# Allegro board PCB EDITOR TUTORIAL.brd

Outline 100 x 50 mm; copper layers: TOP, POWER PLANE, BOTTOM. Coordinates in mm from the lower left corner of the outline.
Outline path: rectangle 0,0 100,50

## Design rules (mm)
constraint set DEFAULT: min track width 0.127
net group DPD: nets D+ D-

## Placement (name value [footprint] x y rotation side)
C1  10uF  [0402-CAP]  4.65 24 180 top
C2  100uF  [1210]  4 13.35 90 top
C3  10uF  [0402-CAP]  10 31.25 270 top
C4  0.1uF  [0402-CAP]  3.35 21 0 top
C5  0.1uF  [0402-CAP]  3.35 18 0 top
C6  0.1uF  [0402-CAP]  2 36 90 top
C7  0.1uF  [0402-CAP]  28 21 270 top
C8  0.1uF  [0402-CAP]  4.65 36 90 top
C9  10uF  [0402-CAP]  28.65 24 180 top
IC1  PIC32MX440F512H  [SQFP-S-10X10-64]  18.29 25 90 top
JP2  PIC 32 PROG  [1X06_LOCK]  13 12 0 top
JP9  -  [XTEND-DIGI-MODEM]  64 25 0 top
MAIN_PWR  RED  [LED_LNJ]  18.29 5 90 top
NOREF  -  [unnamed]  96 4 0 top
NOREF#2  -  [unnamed]  4 4 0 top
NOREF#3  -  [unnamed]  4 46 0 top
NOREF#4  -  [unnamed]  96 46 0 top
R1  150  [0402-RES]  15.54 5 90 top
R2  56k  [0402-RES]  28.65 17 0 top
U1  LT1965  [MSOP-8_MS]  4.21 29 0 top
X1  USB-B  [USB-MICROB]  19.34 45 180 top
Y1  8MHz  [CRYSTAL-SMD-5X3]  12 35.5 270 top

## Library data of the parts
C1-C9 = CAP
IC1 = PIC32MX440F512H
JP2 = M06_LOCK
JP9 = XTEND-DIGI-MODEM
MAIN_PWR = LED: Tolerance: TOL
R1 R2 = RESISTOR
U1 = LT1965: Tolerance: TOL
X1 = USB-MicroB
Y1 = CRYSTAL

## Footprints (pads in the part's own frame, mm; a bottom-side part is the same pattern mirrored in y, then rotated)
1X06_LOCK
  round 1.88 hole 1.016: 1(0,0) 2(2.54,-0.254) 3(5.08,0) 4(7.62,-0.254) 5(10.16,0) 6(12.7,-0.254)
0402-CAP
  rect 0.7x0.9 smd: 1(-0.65,0) 2(0.65,0)
0402-RES
  rect 0.7x0.9 smd: 1(-0.65,0) 2(0.65,0)
1210
  rect 1.2x2 smd: 1(-1.6,0) 2(1.6,0)
CRYSTAL-SMD-5X3
  rect 1.1x1.9 smd: 1(-1.15,1.85) 2(-1.15,-1.85) 3(1.15,-1.85) 4(1.15,1.85)
LED_LNJ
  rect 0.445x0.95 smd: 1(-0.652,0) 2(0.652,0)
MSOP-8_MS
  rect 1.397x0.432 smd: 1(-2.21,0.975) 2(-2.21,0.325) 3(-2.21,-0.325) 4(-2.21,-0.975) 5(2.21,-0.975) 6(2.21,-0.325) 7(2.21,0.325) 8(2.21,0.975)
SQFP-S-10X10-64
  rect 1.6x0.295 smd: 1(-5.6,3.75) 2(-5.6,3.25) 3(-5.6,2.75) 4(-5.6,2.25) 5(-5.6,1.75) 6(-5.6,1.25) 7(-5.6,0.75) 8(-5.6,0.25) 9(-5.6,-0.25) 10(-5.6,-0.75) 11(-5.6,-1.25) 12(-5.6,-1.75) 13(-5.6,-2.25) 14(-5.6,-2.75) 15(-5.6,-3.25) 16(-5.6,-3.75) 33(5.6,-3.75) 34(5.6,-3.25) 35(5.6,-2.75) 36(5.6,-2.25) 37(5.6,-1.75) 38(5.6,-1.25) 39(5.6,-0.75) 40(5.6,-0.25) 41(5.6,0.25) 42(5.6,0.75) 43(5.6,1.25) 44(5.6,1.75) 45(5.6,2.25) 46(5.6,2.75) 47(5.6,3.25) 48(5.6,3.75)
  rect 0.295x1.6 smd: 17(-3.75,-5.6) 18(-3.25,-5.6) 19(-2.75,-5.6) 20(-2.25,-5.6) 21(-1.75,-5.6) 22(-1.25,-5.6) 23(-0.75,-5.6) 24(-0.25,-5.6) 25(0.25,-5.6) 26(0.75,-5.6) 27(1.25,-5.6) 28(1.75,-5.6) 29(2.25,-5.6) 30(2.75,-5.6) 31(3.25,-5.6) 32(3.75,-5.6) 49(3.75,5.6) 50(3.25,5.6) 51(2.75,5.6) 52(2.25,5.6) 53(1.75,5.6) 54(1.25,5.6) 55(0.75,5.6) 56(0.25,5.6) 57(-0.25,5.6) 58(-0.75,5.6) 59(-1.25,5.6) 60(-1.75,5.6) 61(-2.25,5.6) 62(-2.75,5.6) 63(-3.25,5.6) 64(-3.75,5.6)
unnamed
  round 4.064 hole 3.81: (0,0)
USB-MICROB
  rect 0.35x1.4 smd: D+(0,2.65) D-(-0.65,2.65) GND(1.3,2.65) ID(0.65,2.65) VBUS(-1.3,2.65)
  rect 1.8x1.9 smd: MT1(-3.8,0) MT2(3.8,0)
  rect 2.1x1.6 smd: MT3(-3.1,2.55) MT4(3.1,2.55)
  rect 1.9x1.9 smd: P_1(-1.2,0) P_2(1.2,0)
XTEND-DIGI-MODEM
  round 0 hole 3.3 unplated: (-26.5,14.5) (-26.5,-14.5) (26.5,14.5) (26.5,-14.5)
  round 1.422 hole 0.7: 1(-27.5,9) 2(-25.5,9) 3(-27.5,7) 4(-25.5,7) 5(-27.5,5) 6(-25.5,5) 7(-27.5,3) 8(-25.5,3) 9(-27.5,1) 10(-25.5,1) 11(-27.5,-1) 12(-25.5,-1) 13(-27.5,-3) 14(-25.5,-3) 15(-27.5,-5) 16(-25.5,-5) 17(-27.5,-7) 18(-25.5,-7) 19(-27.5,-9) 20(-25.5,-9)

## Nets
3.3V: C2.1 C4.1 C5.1 C6.1 C7.1 C8.1 IC1.10 IC1.19 IC1.26 IC1.35 IC1.38 JP2.2 R1.1 R2.1 U1.1 U1.2(OUT_1) U1.3
GND: C1.2 C2.2 C3.2 C4.2 C5.2 C6.2 C7.2 C8.2 C9.2 IC1.9 IC1.20 IC1.25 IC1.41 JP2.3 JP9.1 MAIN_PWR.1(CATHODE) U1.4 U1.5 X1.GND Y1.2 Y1.4(GND_4)
VBUS: C1.1 IC1.34 JP9.2(VCC) U1.6 U1.7 U1.8 X1.VBUS
CTS: IC1.21 JP9.9
D+: IC1.37 X1.D+
D-: IC1.36 X1.D-
PROG0: IC1.17 JP2.5
PROG1: IC1.18 JP2.4
RESET: IC1.7(_MCLR) JP2.1
RTS: IC1.29 JP9.10
SHDN: IC1.59 JP9.7
URX: IC1.31 JP9.6
UTX: IC1.32 JP9.5
N01360: MAIN_PWR.2 R1.2
N01559: C3.1 JP9.11 R2.2
N01622: IC1.39 Y1.1
N01634: IC1.40 Y1.3
N01671: C9.1 IC1.56

Pads without a net: IC1 1 2 3 4 5 6 8 11 12 13 14 15 16 22 23 24 27 28 30 33 42 43 44 45 46 47 48 49 50 51 52 53 54 55 57 58 60 61 62 63 64; JP2 6; JP9 3 4 8 12 13 14 15 16 17 18 19 20; X1 ID MT1 MT2 MT3 MT4 P_1 P_2

## Routing (per net, layer and track width the routed paths; a pad name or vN(x,y) marks a point on that pad's centre or on a via; arc(x,y) is an arc through that point)
3.3V: length 4.5
  POWER PLANE w0.381: 15.54,10.63 JP2.2 ; JP2.2 14.42,11.75 ; JP2.2 15.54,12.86 ; JP2.2 16.66,11.75
GND: length 8
  BOTTOM w0.381: 35.61,34 JP9.1 ; JP9.1 37.39,34 ; JP9.1 36.5,34.89 ; JP9.1 36.5,33.11 ; JP2.3 18.08,13.12 ; JP2.3 18.08,10.88 ; JP2.3 19.2,12 ; JP2.3 16.96,12

## Copper pours and planes (outline as drawn; the poured copper is in the pictures)
3.3V on POWER PLANE: 0.3,0.3 0.3,49.7 99.7,49.7 99.7,0.3
GND on BOTTOM: 0.56,0.48 0.56,49.38 99.62,49.38 99.62,0.48
